# Altium PCB GPS-speed.PcbDoc
Units mm, origin at the board's own origin, x right, y up, seen from the top; angles counter-clockwise.
Board outline 78.74 x 72.39 mm, 2 copper layers (Top Layer, Bottom Layer); 25 components, 24 nets, 146 pads, 0 vias.
Unrouted connection lines stored in the file: 3.
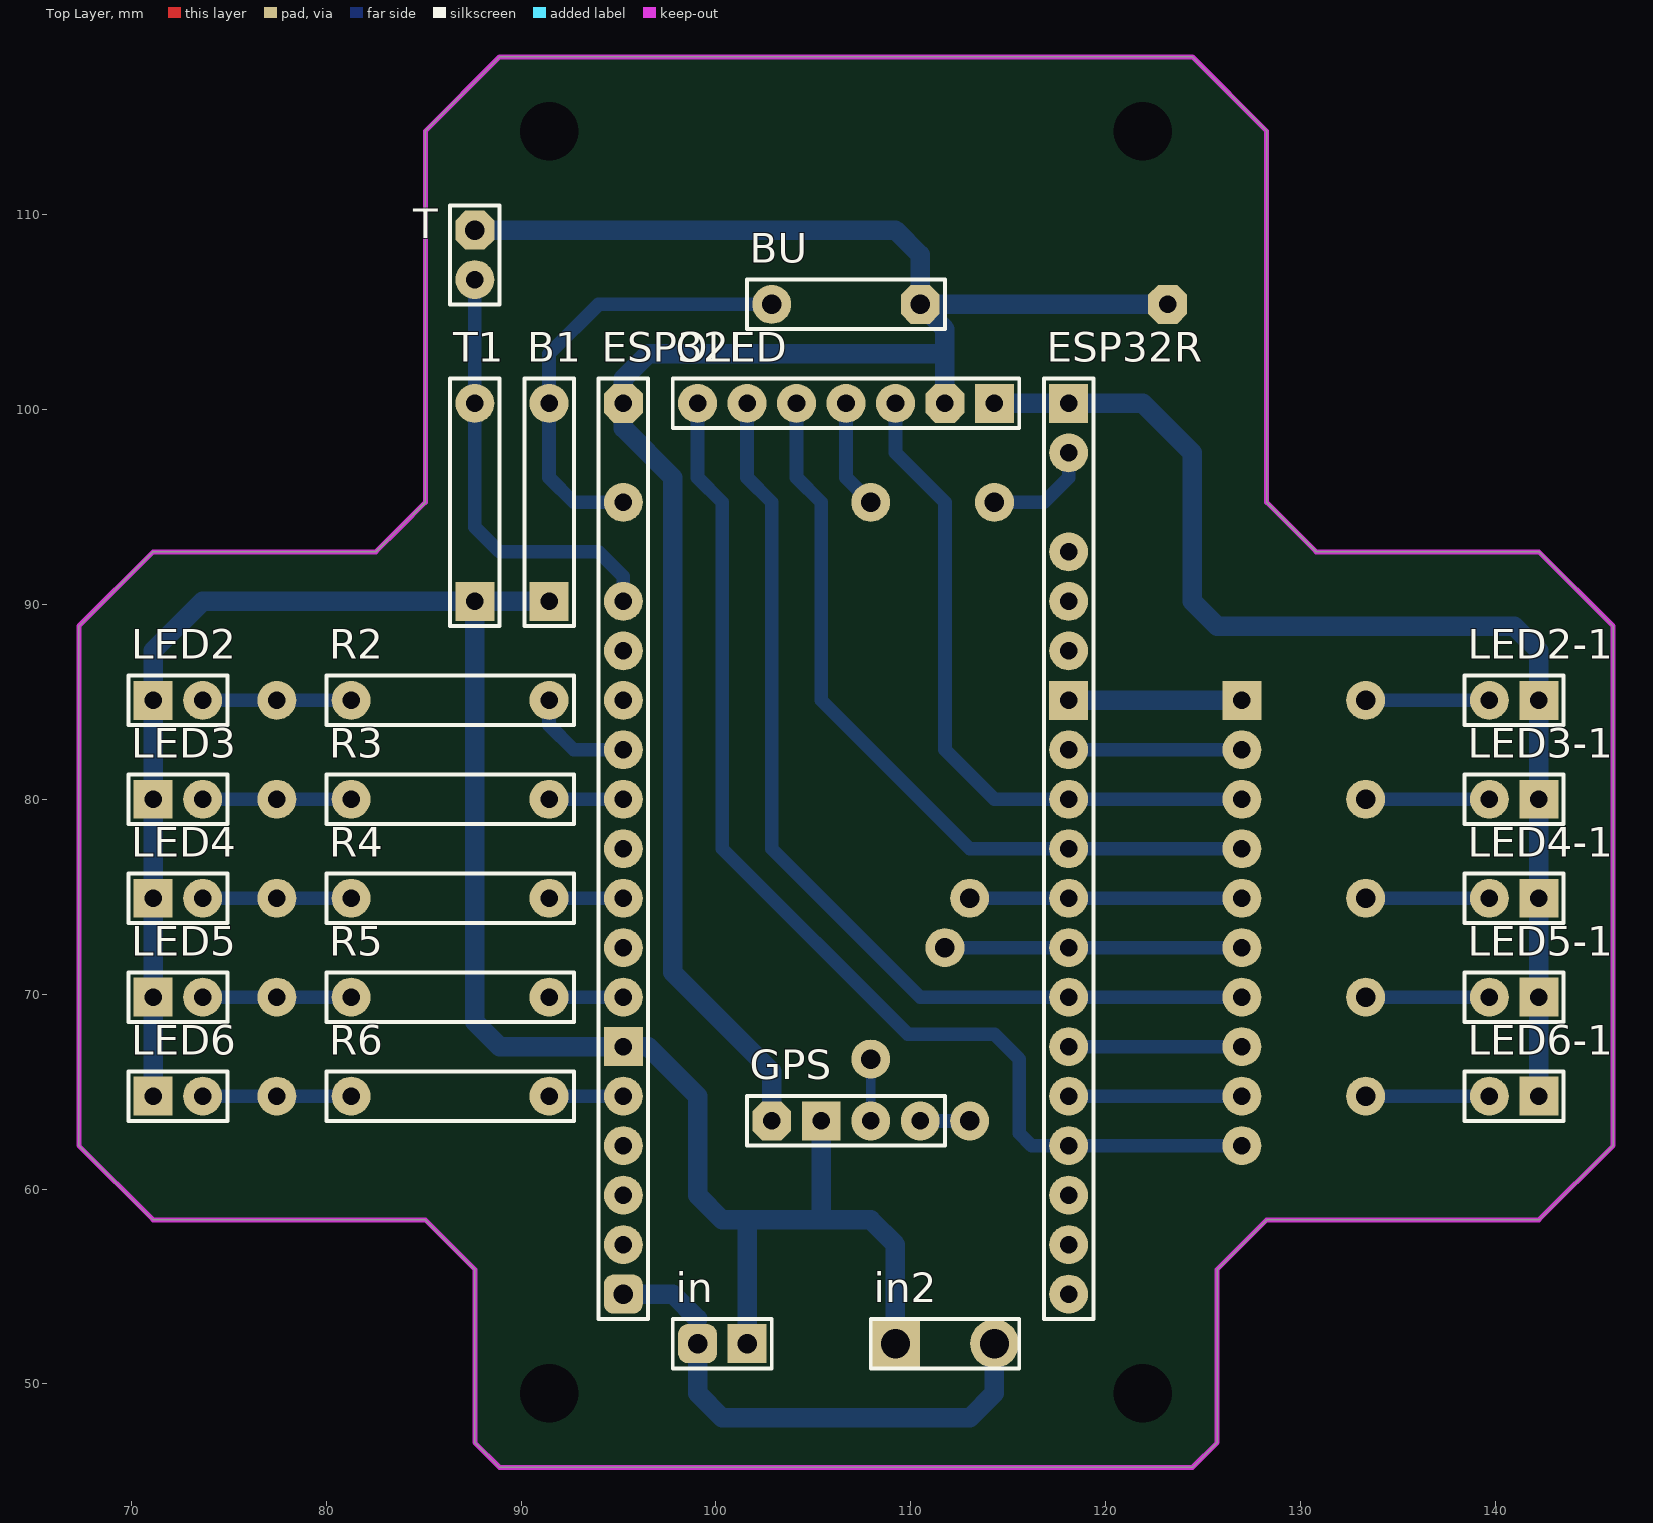
[diagram p0: Top Layer view]
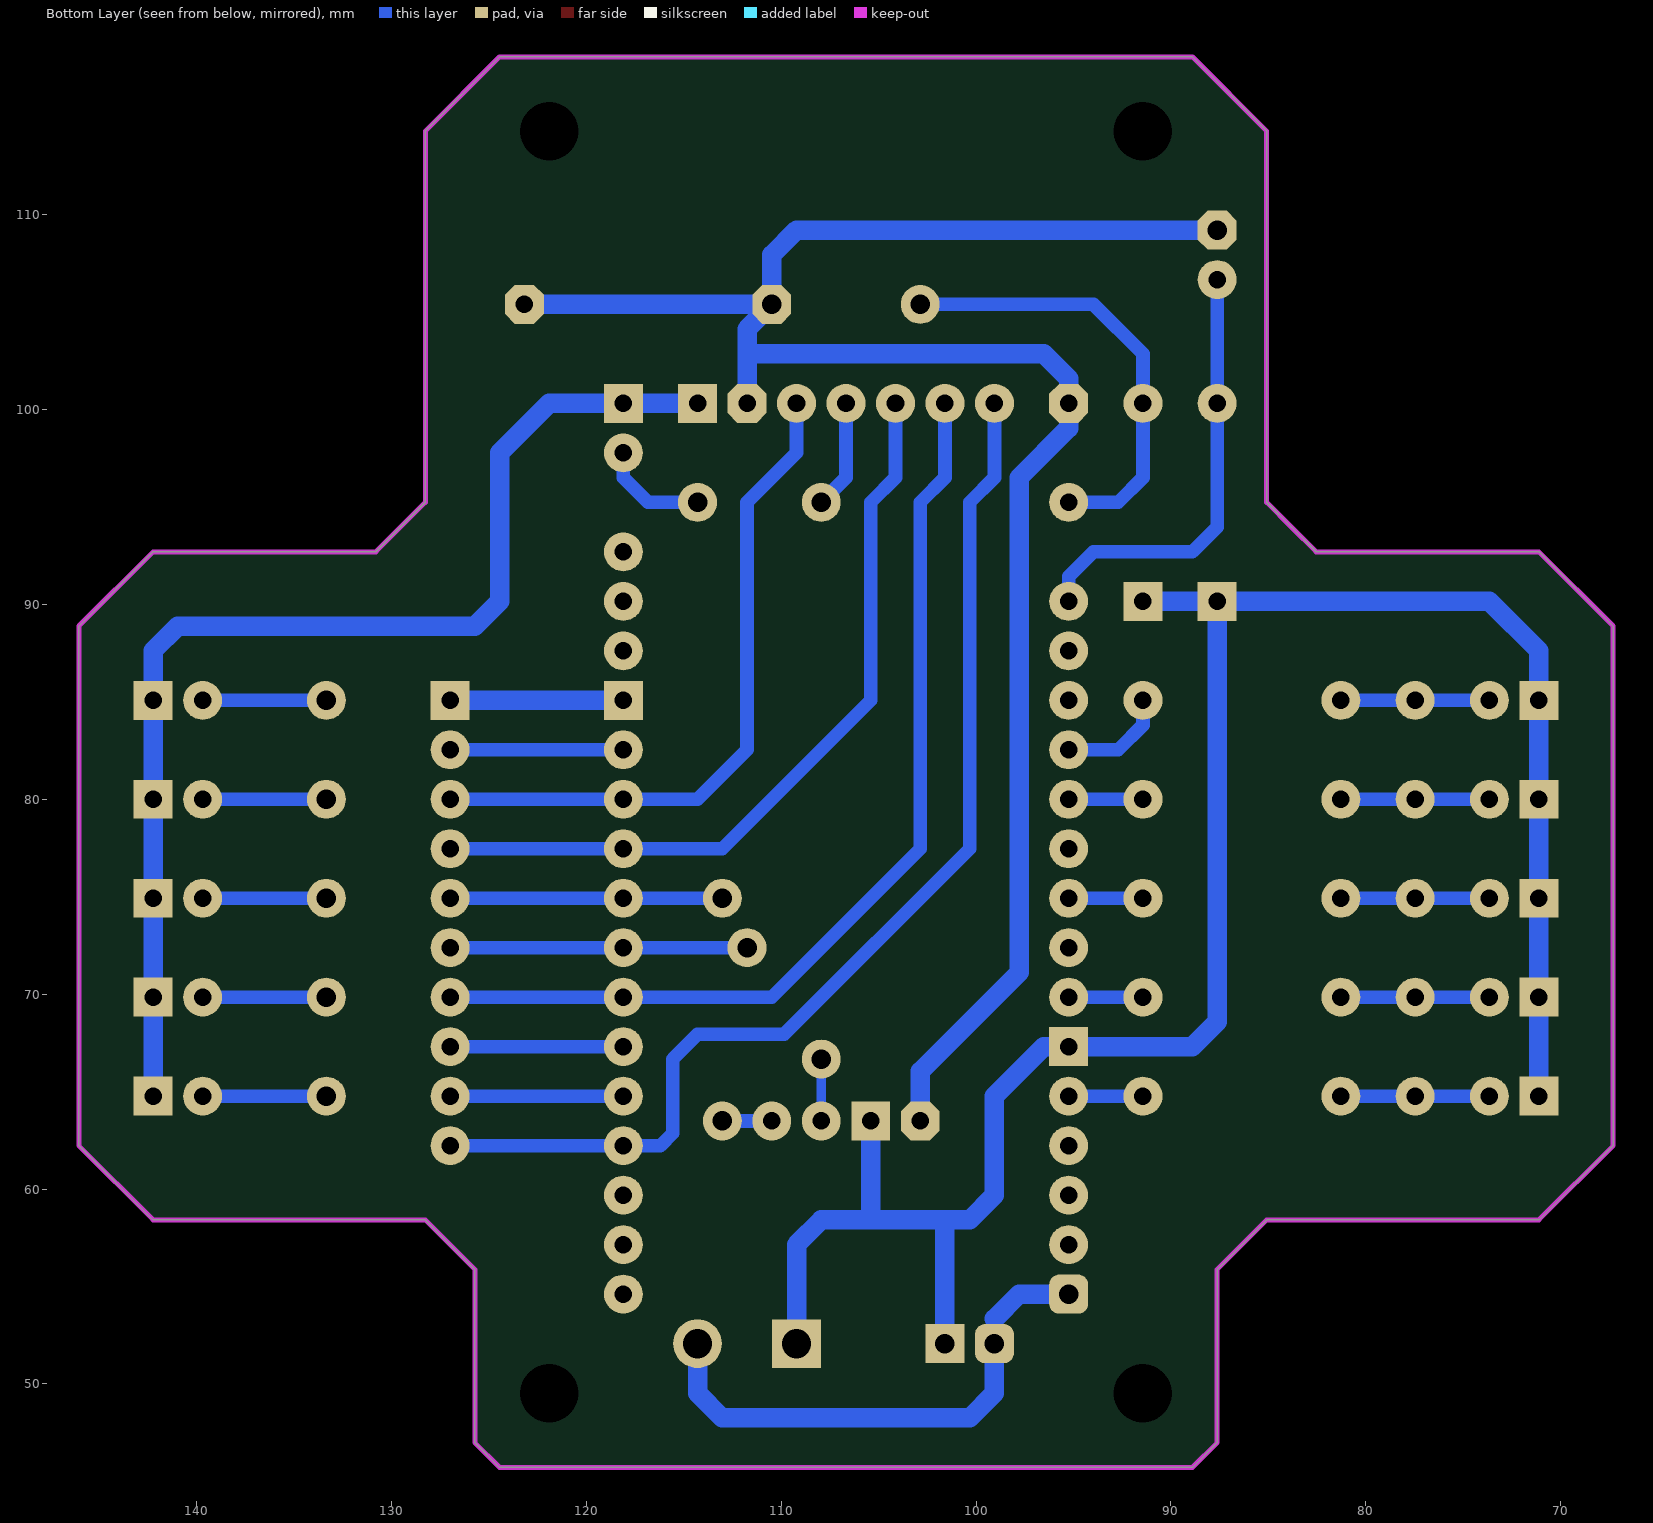
[diagram p1: Bottom Layer view, seen from below]

## Layer stack, top to bottom
Top Solder: solder mask 0.0102, Solder Resist, Dk 3.5
Top Layer: signal copper 0.0356
Dielectric 1: dielectric 0.32, FR-4, Dk 4.8
Bottom Layer: signal copper 0.0356
Bottom Solder: solder mask 0.0102, Solder Resist, Dk 3.5

## Board outline
71.12,58.42 85.09,58.42 86.36,57.15 87.63,55.88 87.63,46.99 88.9,45.72 124.46,45.72 125.73,46.99 125.73,55.88 128.27,58.42 142.24,58.42 146.05,62.23 146.05,88.9 142.24,92.71 130.81,92.71 128.27,95.25 128.27,114.3 124.46,118.11 88.9,118.11 85.09,114.3 85.09,95.25 83.82,93.98 82.55,92.71 71.12,92.71 67.31,88.9 67.31,62.23

## Design rules (kind name [scope] priority, off if disabled: settings)
Clearance [All] p1: gap=0.254 ignorepadtopadclearanceinfootprint=FALSE except(0: Arc-Hole Track-Hole SMDPad-Hole THPad-Hole Via-Hole Fill-Hole Poly-Hole Region-Hole Text-Hole)
PolygonConnect [All] p1: connectstyle=Relief reliefconductorwidth=0.254 reliefentries=4 polygonreliefangle="90 Angle" airgapwidth=0.254
RoutingVias [All] p1: holewidth=0.711 width=1.27 viastyle="Through Hole" minholewidth=0.711 minwidth=1.27 maxholewidth=0.711 maxwidth=1.27
SolderMaskExpansion [All] p1: expansion=0.102
Width Width_1 [InNet('GND','GND1','GND2','3.3V','5V')] p1: maxlimit=2 minlimit=0.254 preferedwidth=1
Width [All] p2: maxlimit=2 minlimit=0.254 preferedwidth=0.7
30 further rules are at their usual default settings.

## Components (designator, comment, footprint, x,y, rotation, side; value= is the part's Value field where it differs from the comment)
B1 "Header 5" HDR1X5#1 91.44,90.17 r90 top
BU "Header 4" HDR1X4#1 102.87,105.41 r0 top
ESP32L "Header 19" HDR1X19#1 95.25,100.33 r270 top
ESP32R "Header 19" HDR1X19#2 118.11,100.33 r270 top
GPS "Header 4" HDR1X4#2 110.49,63.5 r180 top
in "Header 2" HDR1X2#1 101.6,52.07 r180 top
in2 "Header 3" HDR1X3 109.22,52.07 r0 top
LED2 "Header 2" HDR1X2#2 71.12,85.09 r0 top
LED2-1 "Header 2" HDR1X2#2 142.24,85.09 r180 top
LED3 "Header 2" HDR1X2#2 71.12,80.01 r0 top
LED3-1 "Header 2" HDR1X2#2 142.24,80.01 r180 top
LED4 "Header 2" HDR1X2#2 71.12,74.93 r0 top
LED4-1 "Header 2" HDR1X2#2 142.24,74.93 r180 top
LED5 "Header 2" HDR1X2#2 71.12,69.85 r0 top
LED5-1 "Header 2" HDR1X2#2 142.24,69.85 r180 top
LED6 "Header 2" HDR1X2#2 71.12,64.77 r0 top
LED6-1 "Header 2" HDR1X2#2 142.24,64.77 r180 top
OLED "Header 7" HDR1X7 114.3,100.33 r180 top
R2 "Header 5" HDR1X5#2 81.28,85.09 r0 top
R3 "Header 5" HDR1X5#2 81.28,80.01 r0 top
R4 "Header 5" HDR1X5#2 81.28,74.93 r0 top
R5 "Header 5" HDR1X5#2 81.28,69.85 r0 top
R6 "Header 5" HDR1X5#2 81.28,64.77 r0 top
T "Header 2" HDR1X2#3 87.63,106.68 r90 top
T1 "Header 5" HDR1X5#1 87.63,90.17 r90 top

## Footprints (in the part's own frame and the unit in brackets; to place one, negate y for a bottom-side part, rotate by r counter-clockwise, add the part's x,y. Pads: shape width x height; smd on the part's side, far side on the other; paste and mask are expansions set on the pad)
HDR1X2#1 [mm] "Connector; Header; 2 Position"
  rect 2x2 hole 1: 1(0,0)
  rrect50% 2x2 hole 1: 2(2.54,0)
  silkscreen extent -1.27,-1.27 3.81,1.27
HDR1X2#2 [mm] "Connector; Header; 2 Position"
  rect 2x2 hole 0.9: 1(0,0)
  round 2 hole 0.9: 2(2.54,0)
  silkscreen extent -1.27,-1.27 3.81,1.27
HDR1X2#3 [mm] "Connector; Header; 2 Position"
  round 2 hole 0.9: 1(0,0)
  oct 2x2 hole 1: 2(2.54,0)
  silkscreen extent -1.27,-1.27 3.81,1.27
HDR1X3 [mm] "Connector; Header; 3 Position"
  rect 2.5x2.5 hole 1.5: 1(0,0)
  round 0 all layers, no hole: 2(2.54,0)
  round 2.5 hole 1.5: 3(5.08,0)
  silkscreen extent -1.27,-1.27 6.35,1.27
HDR1X4#1 [mm] "Connector; Header; 4 Position"
  round 2 hole 1: 1(0,0)
  round 0 all layers, no hole: 2(2.54,0) 3(5.08,0)
  oct 2x2 hole 1: 4(7.62,0)
  silkscreen extent -1.27,-1.27 8.89,1.27
HDR1X4#2 [mm] "Connector; Header; 4 Position"
  round 2 hole 0.9: 1(0,0) 2(2.54,0)
  rect 2x2 hole 0.9: 3(5.08,0)
  oct 2x2 hole 0.9: 4(7.62,0)
  silkscreen extent -1.27,-1.27 8.89,1.27
HDR1X5#1 [mm] "Connector; Header; 5 Position"
  rect 2x2 hole 0.9: 1(0,0)
  round 0 all layers, no hole: 2(2.54,0) 3(5.08,0) 4(7.62,0)
  round 2 hole 0.9: 5(10.16,0)
  silkscreen extent -1.27,-1.27 11.43,1.27
HDR1X5#2 [mm] "Connector; Header; 5 Position"
  round 2 hole 0.9: 1(0,0) 5(10.16,0)
  round 0 all layers, no hole: 2(2.54,0) 3(5.08,0) 4(7.62,0)
  silkscreen extent -1.27,-1.27 11.43,1.27
HDR1X7 [mm] "Connector; Header; 7 Position"
  rect 2x2 hole 0.9: 1(0,0)
  oct 2x2 hole 0.9: 2(2.54,0)
  round 2 hole 0.9: 3(5.08,0) 4(7.62,0) 5(10.16,0) 6(12.7,0) 7(15.24,0)
  silkscreen extent -1.27,-1.27 16.51,1.27
HDR1X19#1 [mm] "Connector; Header; 19 Position"
  oct 2x2 hole 0.9: 1(0,0)
  round 0 all layers, no hole: 2(2.54,0) 4(7.62,0)
  round 2 hole 0.9: 3(5.08,0) 5(10.16,0) 6(12.7,0) 7(15.24,0) 8(17.78,0) 9(20.32,0) 10(22.86,0) 11(25.4,0) 12(27.94,0) 13(30.48,0) 15(35.56,0) 16(38.1,0) 17(40.64,0) 18(43.18,0)
  rect 2x2 hole 0.9: 14(33.02,0)
  rrect50% 2x2 hole 1: 19(45.72,0)
  silkscreen extent -1.27,-1.27 46.99,1.27
HDR1X19#2 [mm] "Connector; Header; 19 Position"
  rect 2x2 hole 0.9: 1(0,0) 7(15.24,0)
  round 2 hole 0.9: 2(2.54,0) 4(7.62,0) 5(10.16,0) 6(12.7,0) 8(17.78,0) 9(20.32,0) 10(22.86,0) 11(25.4,0) 12(27.94,0) 13(30.48,0) 14(33.02,0) 15(35.56,0) 16(38.1,0) 17(40.64,0) 18(43.18,0) 19(45.72,0)
  round 0 all layers, no hole: 3(5.08,0)
  silkscreen extent -1.27,-1.27 46.99,1.27

## Part data
B1 R2 R3 R4 R5 R6 T1: "Header, 5-Pin", LatestRevisionDate=17-Jul-2002, LatestRevisionNote="Re-released for DXP Platform.", Publisher="Altium Limited"
BU GPS: "Header, 4-Pin", LatestRevisionDate=17-Jul-2002, LatestRevisionNote="Re-released for DXP Platform.", Publisher="Altium Limited"
ESP32L ESP32R: "Header, 19-Pin", LatestRevisionDate=17-Jul-2002, LatestRevisionNote="Re-released for DXP Platform.", Publisher="Altium Limited"
in LED2 LED2-1 LED3 LED3-1 LED4 LED4-1 LED5 LED5-1 LED6 LED6-1 T: "Header, 2-Pin", LatestRevisionDate=17-Jul-2002, LatestRevisionNote="Re-released for DXP Platform.", Publisher="Altium Limited"
in2: "Header, 3-Pin", LatestRevisionDate=17-Jul-2002, LatestRevisionNote="Re-released for DXP Platform.", Publisher="Altium Limited"
OLED: "Header, 7-Pin", LatestRevisionDate=17-Jul-2002, LatestRevisionNote="Re-released for DXP Platform.", Publisher="Altium Limited"

## Free pads (board coordinates)
  round 2 hole 1: 2(114.3,95.25) 3(107.95,95.25) 4(113.03,74.93) 5(111.76,72.39) 12(107.95,66.675) 13(113.03,63.5) 14(133.35,85.09) 15(133.35,80.01) 16(133.35,74.93) 17(133.35,69.85) 18(133.35,64.77)
  round 0 hole 3: 8(91.44,114.3) 9(121.92,114.3) 10(121.92,49.53) 11(91.44,49.53)
  round 2 hole 0.9: 30(77.47,64.77) 31(77.47,69.85) 33(77.47,74.93) 34(77.47,80.01) 35(77.47,85.09) 37(127,82.55) 38(127,80.01) 39(127,77.47) 40(127,74.93) 41(127,72.39) 42(127,69.85) 43(127,67.31) 44(127,64.77) 46(127,62.23)
  rect 2x2 hole 0.9: 36(127,85.09)
  oct 2x2 hole 0.9: 47(123.19,105.41)

## Nets (pads, with @x,y where several pads share a name; then routed paths per layer and width w, separated by ;. In a path a pad name is that pad's centre, name@x,y a point inside that pad or via, vN(x,y) a via of type N, cw(c..) or ccw(c..) an arc to the next point about the centre after c; other vN are vias at no path point)
3.3V: BU.4 ESP32L.1 GPS.4 OLED.2 pad.47 T.2 | length 102.5
  Bottom Layer w1: T.2 109.22,109.22 110.49,107.95 BU.4 ; GPS.4 102.87,66.04 97.79,71.12 97.79,96.52 95.25,99.06 ESP32L.1 95.25,101.6 96.52,102.87 111.76,102.87 ; OLED.2 111.76,102.87 ; pad.47 BU.4 ; BU.4 111.76,104.14 111.76,102.87
5V: ESP32L.19 in2.3 in.2 | length 25.7
  Bottom Layer w1: ESP32L.19 97.79,54.61 99.06,53.34 ; in.2 99.06,49.53 100.33,48.26 113.03,48.26 114.3,49.53 in2.3
GND: ESP32R.7 pad.36 | length 8.9
  Bottom Layer w1: ESP32R.7 pad.36
GND1: ESP32R.1 LED2-1.1 LED3-1.1 LED4-1.1 LED5-1.1 LED6-1.1 OLED.1 | length 60.5
  Bottom Layer w1: OLED.1 ESP32R.1 121.92,100.33 124.46,97.79 124.46,90.17 125.73,88.9 140.97,88.9 142.24,87.63 LED2-1.1 LED3-1.1 LED4-1.1 LED5-1.1 LED6-1.1
GND2: B1.1 ESP32L.14 GPS.3 in2.1 in.1 LED2.1 LED3.1 LED4.1 LED5.1 LED6.1 T1.1 | length 111.6
  Bottom Layer w1: LED6.1 LED5.1 LED4.1 LED3.1 LED2.1 71.12,87.63 73.66,90.17 T1.1 ; B1.1 T1.1 ; in.1 101.6,58.42 ; GPS.3 105.41,58.42 ; in2.1 109.22,57.15 107.95,58.42 105.41,58.42 ; T1.1 87.63,68.58 88.9,67.31 ESP32L.14 96.52,67.31 99.06,64.77 99.06,59.69 100.33,58.42 101.6,58.42 ; 101.6,58.42 105.41,58.42
NetB1_5: B1.5 BU.1 ESP32L.3 | length 23.2
  Bottom Layer w0.7: ESP32L.3 92.71,95.25 91.44,96.52 B1.5 91.44,102.87 93.98,105.41 BU.1
NetESP32L_5: ESP32L.5 T1.5 T.1 | length 22.6
  Bottom Layer w0.7: T.1 T1.5 87.63,93.98 88.9,92.71 93.98,92.71 95.25,91.44 ESP32L.5
NetESP32L_8: ESP32L.8 R2.5 | length 5.6
  Bottom Layer w0.7: R2.5 91.44,83.82 92.71,82.55 ESP32L.8
NetESP32L_9: ESP32L.9 R3.5 | length 3.8
  Bottom Layer w0.7: R3.5 ESP32L.9
NetESP32L_11: ESP32L.11 R4.5 | length 3.8
  Bottom Layer w0.7: R4.5 ESP32L.11
NetESP32L_13: ESP32L.13 R5.5 | length 3.8
  Bottom Layer w0.7: R5.5 ESP32L.13
NetESP32L_15: ESP32L.15 R6.5 | length 3.8
  Bottom Layer w0.7: R6.5 ESP32L.15
NetESP32R_2: ESP32R.2 OLED.4 pad.2 pad.3 | length 11.2
  Bottom Layer w0.7: OLED.4 106.68,96.52 pad.3 ; pad.2 116.84,95.25 118.11,96.52 ESP32R.2
NetESP32R_9: ESP32R.9 OLED.3 pad.38 | length 35.1
  Bottom Layer w0.7: OLED.3 109.22,97.79 111.76,95.25 111.76,82.55 114.3,80.01 ESP32R.9 pad.38
NetESP32R_10: ESP32R.10 OLED.5 pad.39 | length 40.5
  Bottom Layer w0.7: OLED.5 104.14,96.52 105.41,95.25 105.41,85.09 113.03,77.47 ESP32R.10 pad.39
NetESP32R_11: ESP32R.11 GPS.1 pad.4 pad.13 pad.40 | length 16.5
  Bottom Layer w0.7: GPS.1 pad.13 ; pad.4 ESP32R.11 pad.40
NetESP32R_12: ESP32R.12 GPS.2 pad.5 pad.12 pad.41 | length 18.4
  Bottom Layer w0.5: GPS.2 pad.12
  Bottom Layer w0.7: pad.5 ESP32R.12 pad.41
NetESP32R_13: ESP32R.13 OLED.6 pad.42 | length 50.7
  Bottom Layer w0.7: OLED.6 101.6,96.52 102.87,95.25 102.87,77.47 110.49,69.85 ESP32R.13 pad.42
NetESP32R_16: ESP32R.16 OLED.7 pad.46 | length 58.6
  Bottom Layer w0.7: OLED.7 99.06,96.52 100.33,95.25 100.33,77.47 109.855,67.945 114.3,67.945 115.57,66.675 115.57,62.865 116.205,62.23 ESP32R.16 pad.46
NetLED2_2: LED2.2 pad.35 R2.1 | length 7.6
  Bottom Layer w0.7: LED2.2 pad.35 R2.1
NetLED3_2: LED3.2 pad.34 R3.1 | length 7.6
  Bottom Layer w0.7: LED3.2 pad.34 R3.1
NetLED4_2: LED4.2 pad.33 R4.1 | length 7.6
  Bottom Layer w0.7: LED4.2 pad.33 R4.1
NetLED5_2: LED5.2 pad.31 R5.1 | length 7.6
  Bottom Layer w0.7: LED5.2 pad.31 R5.1
NetLED6_2: LED6.2 pad.30 R6.1 | length 7.6
  Bottom Layer w0.7: LED6.2 pad.30 R6.1
pads on no net: B1.2 B1.3 B1.4 BU.2 BU.3 ESP32L.2 ESP32L.4 ESP32L.6 ESP32L.7 ESP32L.10 ESP32L.12 ESP32L.16 ESP32L.17 ESP32L.18 ESP32R.3 ESP32R.4 ESP32R.5 ESP32R.6 ESP32R.8 ESP32R.14 ESP32R.15 ESP32R.17 ESP32R.18 ESP32R.19 in2.2 LED2-1.2 LED3-1.2 LED4-1.2 LED5-1.2 LED6-1.2 R2.2 R2.3 R2.4 R3.2 R3.3 R3.4 R4.2 R4.3 R4.4 R5.2 R5.3 R5.4 R6.2 R6.3 R6.4 T1.2 T1.3 T1.4
copper on no net: | length 58.4
  Bottom Layer w0.7: 118.11,64.77 127,64.77 ; 118.11,67.31 127,67.31 ; 118.11,82.55 127,82.55 ; 133.35,64.77 139.7,64.77 ; 133.35,69.85 139.7,69.85 ; 133.35,74.93 139.7,74.93 ; 133.35,80.01 139.7,80.01 ; 133.35,85.09 139.7,85.09

## Keep-outs
Keep-Out Layer:
  lines w0.254: 67.31,62.23 71.12,58.42 85.09,58.42 86.36,57.15 87.63,55.88 87.63,48.26 87.63,46.99 88.9,45.72 95.25,45.72 124.46,45.72 125.73,46.99 125.73,55.88 128.27,58.42 142.24,58.42 146.05,62.23 146.05,88.9 142.24,92.71 130.81,92.71 128.27,95.25 128.27,114.3 124.46,118.11 123.825,118.11 88.9,118.11 85.09,114.3 85.09,99.06 85.09,95.25 83.82,93.98 82.55,92.71 71.12,92.71 67.31,88.9 67.31,62.23